# EAGLE board WeddingWidget-pogo (EAGLE 6.3)

Size 25.07 x 50.79 mm. Coordinates in mm from the lower left corner, seen from the top.
Outline: 0,48.25 0,2.54 arc90 2.54,0 22.53,0 arc90 25.07,2.54 25.07,48.25 arc90 22.53,50.79 2.54,50.79 arc90 0,48.25
Copper layers (1*16): Top 0.0356mm / dielectric 1.5011mm / Bottom 0.0356mm
Design rules "LaenPCBOrder": minimum track width 6mil, minimum drill 13mil, track to track 6mil, track to pad 6mil, pad to pad 6mil, via to via 6mil, smd to smd 6mil, copper to edge 15mil, drill to drill 6mil, minimum pad ring 7mil, minimum via ring 7mil, stop-mask expansion 4mil, vias tented up to drill 0mil, thermal gap 10mil
Holes 3.84 mm at 2.54,48.26 22.86,48.26 2.54,2.54 22.86,2.54

## Footprints (pad centres in the part's own frame; a part is rotated, then mirrored left to right if it is on the bottom)
2X3-NS = drill 1.016 pad 1.88 square: 1 -2.54,-1.27 | drill 1.016 pad 1.88 octagon: 2 -2.54,1.27; 3 0,-1.27; 4 0,1.27; 5 2.54,-1.27; 6 2.54,1.27

## Placement (x,y rotation side)
J1  AVR_SPI_PRG_6NS  [2X3-NS]  12.7,39.37 270 top
J2  AVR_SPI_PRG_6NS  [2X3-NS]  12.7,20.32 0 top

## Library data of the parts
J1 J2 = SparkFun

## Nets
GND: J1.6 J2.6
MISO: J1.1 J2.1
MOSI: J1.4 J2.4
RST: J1.5 J2.5
SCK: J1.3 J2.3
VCC: J1.2 J2.2

## Tracks (layer width: path | path; a pad name or v marks a point on that pad's centre or on a via)
GND  (1 unrouted)
MISO  (1 unrouted)
MOSI  (1 unrouted)
RST  (1 unrouted)
SCK  (1 unrouted)
VCC  (1 unrouted)